# Altium PCB mezza.PcbDoc
Units mm, origin at the board's own origin, x right, y up, seen from the top; angles counter-clockwise.
Board outline 85 x 54 mm, 2 copper layers (Top Layer, Bottom Layer), stack 1.071 mm thick; 2 components, 77 nets, 106 pads, 0 vias.
Unrouted connection lines stored in the file: 27.
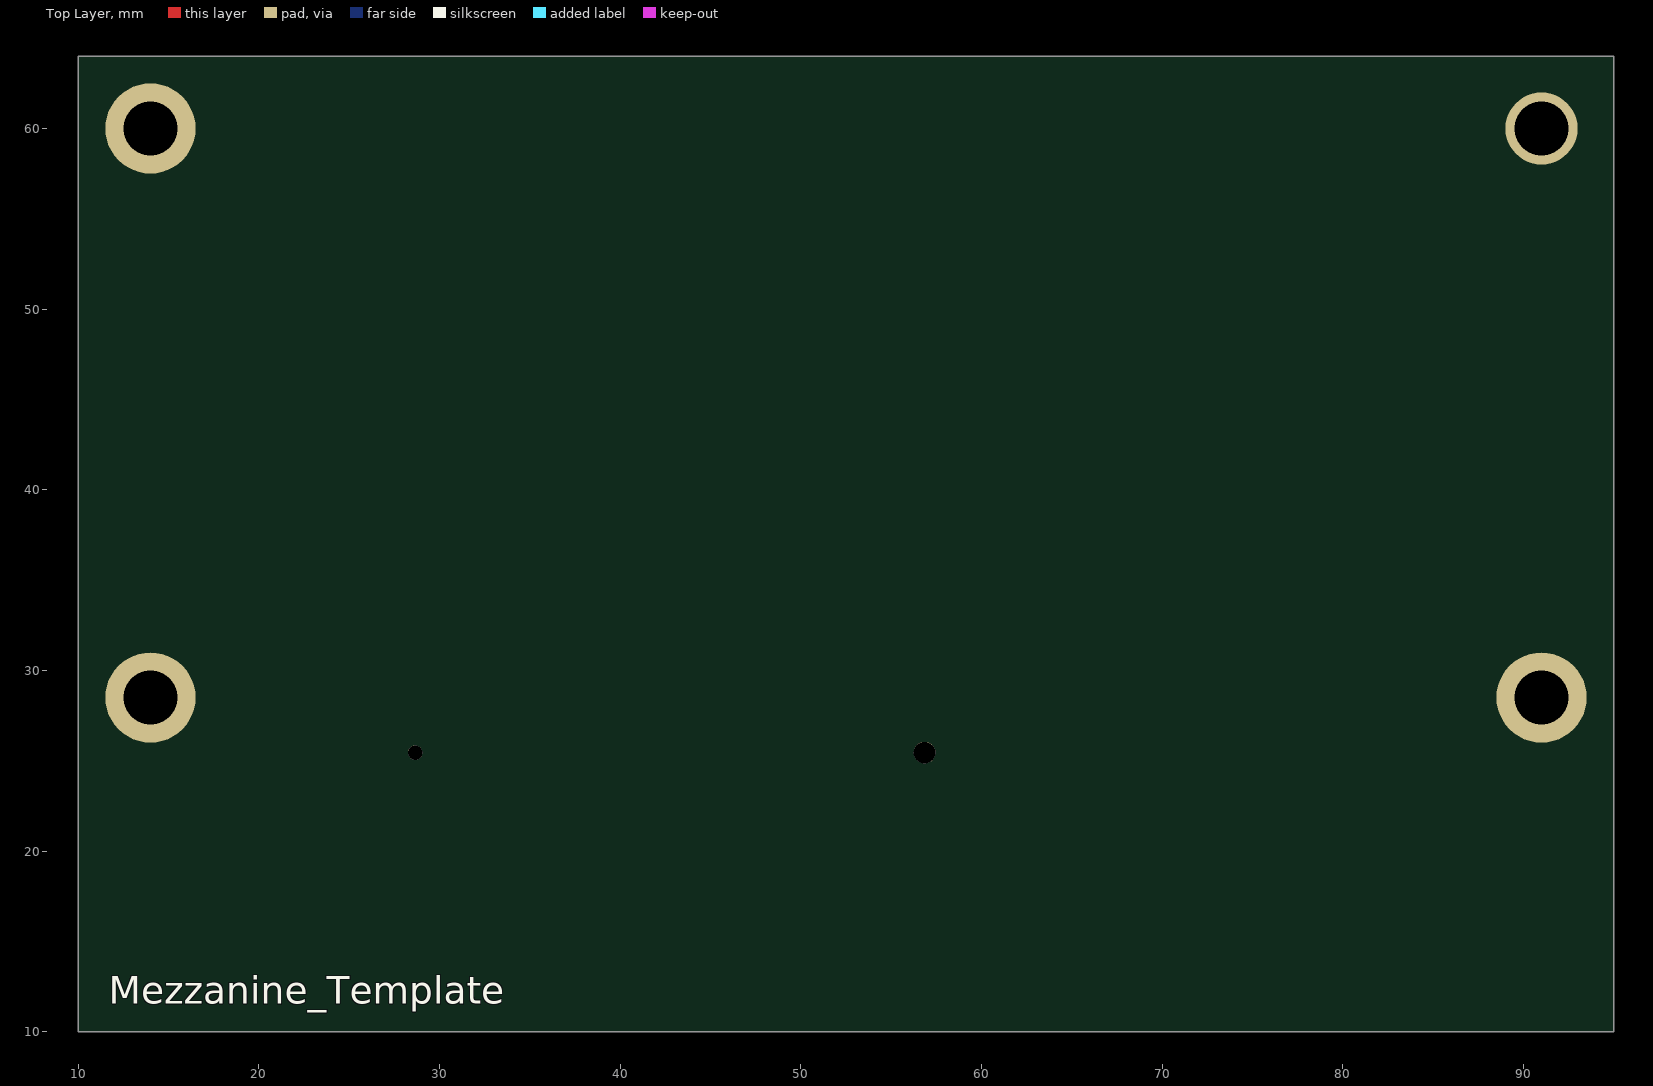
[diagram p0: Top Layer view]
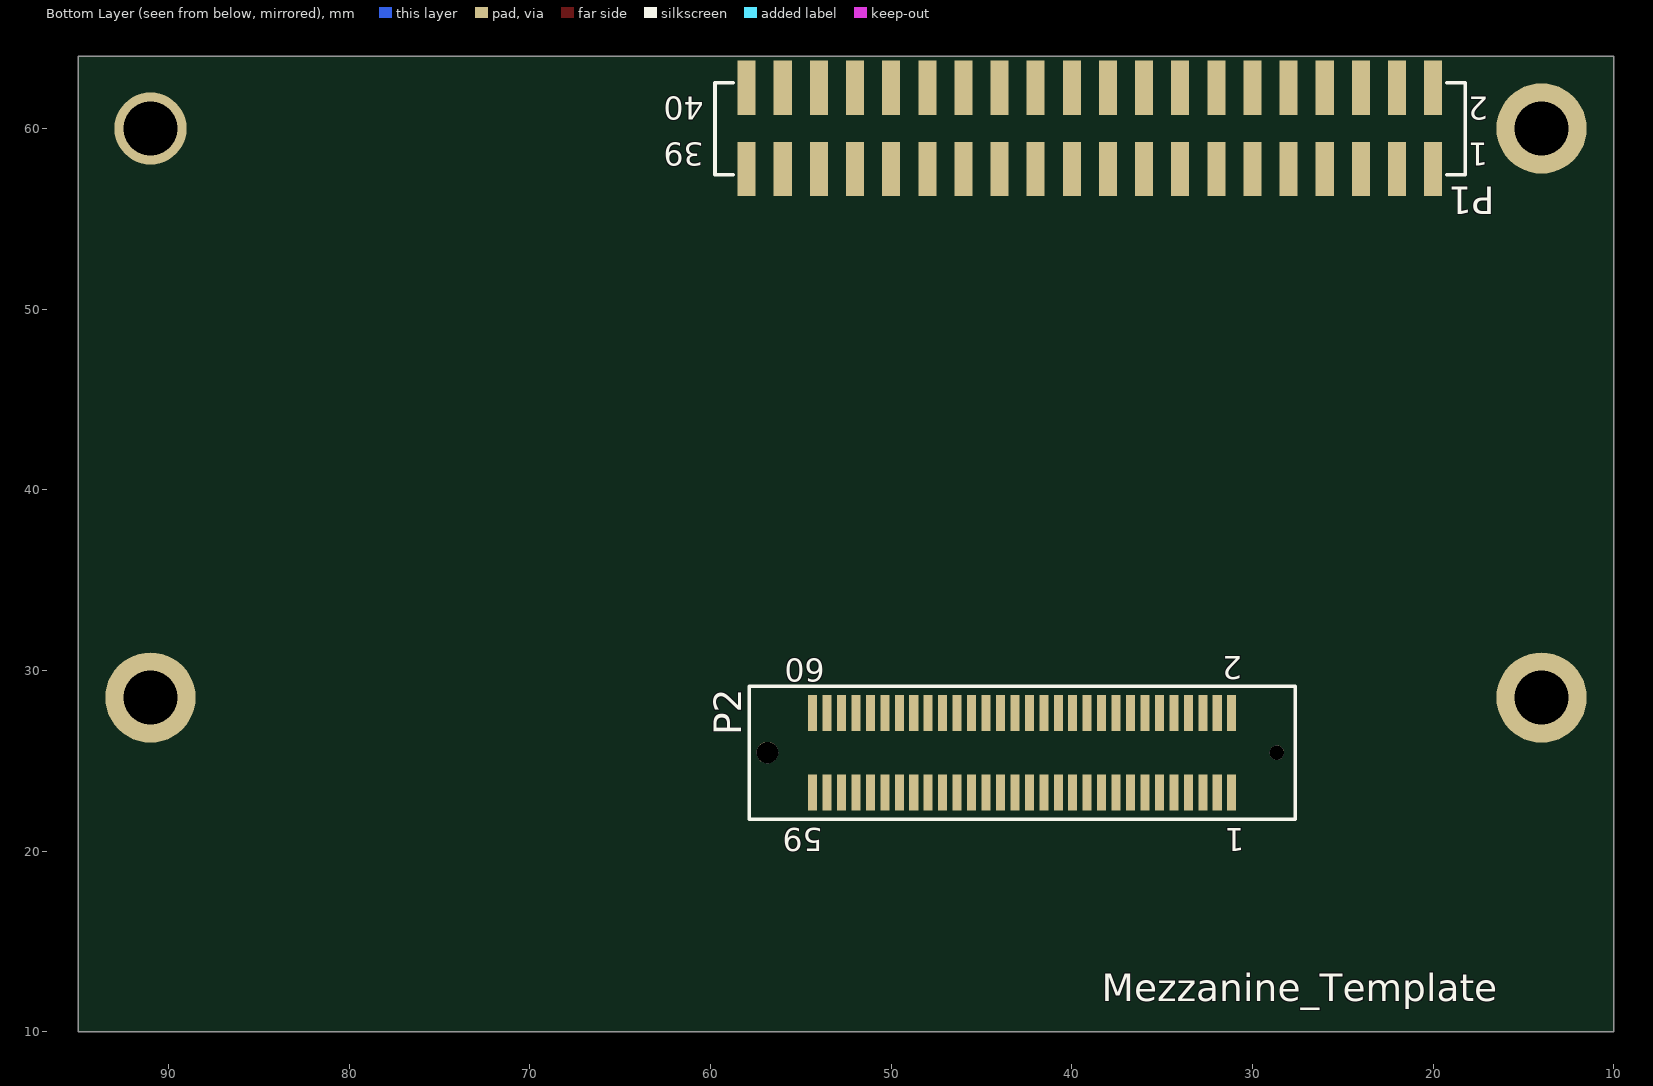
[diagram p1: Bottom Layer view, seen from below]

## Layer stack, top to bottom
Top Solder: solder mask 0.0102, Solder Resist, Dk 3.5
Top Layer: signal copper 0.0356
Dielectric 1: dielectric 1, FR-4, Dk 4.8
Bottom Layer: signal copper 0.0356
Bottom Solder: solder mask 0.0102, Solder Resist, Dk 3.5

## Board outline
10,10 95,10 95,64 10,64

## Design rules (kind name [scope] priority, off if disabled: settings)
Clearance [All] p1: gap=0.254
PolygonConnect [All] p1: connectstyle=Relief reliefconductorwidth=0.254 reliefentries=4 polygonreliefangle="90 Angle" airgapwidth=0.254
RoomDefinition "keepout _through_hole_HDMI" [InComponentClass('Bottom Side Components')] p1: confinementstyle=ConfineOut formatcopy=TRUE lockcomponents=FALSE outline 26,21 44,21 44,10 26,10
RoomDefinition "keepout _through_hole_USB" [InComponentClass('Bottom Side Components')] p2: confinementstyle=ConfineOut formatcopy=TRUE lockcomponents=FALSE outline 58,25.7 95,25.7 95,10 58,10
RoomDefinition "keepout _through_hole_PWR" [InComponentClass('Bottom Side Components')] p3: confinementstyle=ConfineOut formatcopy=TRUE lockcomponents=FALSE outline 77.5,64 88.7,64 88.7,50.2 77.5,50.2
RoutingVias [All] p1: holewidth=0.711 width=1.27 viastyle="Through Hole" minholewidth=0.711 minwidth=1.27 maxholewidth=0.711 maxwidth=1.27
SolderMaskExpansion [All] p1: expansion=0.102
Width [All] p1: maxlimit=0.254 minlimit=0.254 preferedwidth=0.254
30 further rules are at their usual default settings.

## Components (designator, comment, footprint, x,y, rotation, side; value= is the part's Value field where it differs from the comment)
P1 "low-speed_connector" low-speed_connector_SM 20,61 r0 bottom
P2 "High-speed_connector" high-speed_connector 42.75,25.45 r0 bottom

## Footprints (in the part's own frame and the unit in brackets; to place one, negate y for a bottom-side part, rotate by r counter-clockwise, add the part's x,y. Pads: shape width x height; smd on the part's side, far side on the other; paste and mask are expansions set on the pad)
high-speed_connector [mm] "high-speed connector"
  rect 0.5x2 smd: 1(-11.6,2.2) 2(-11.6,-2.2) 3(-10.8,2.2) 4(-10.8,-2.2) 5(-10,2.2) 6(-10,-2.2) 7(-9.2,2.2) 8(-9.2,-2.2) 9(-8.4,2.2) 10(-8.4,-2.2) 11(-7.6,2.2) 12(-7.6,-2.2) 13(-6.8,2.2) 14(-6.8,-2.2) 15(-6,2.2) 16(-6,-2.2) 17(-5.2,2.2) 18(-5.2,-2.2) 19(-4.4,2.2) 20(-4.4,-2.2) 21(-3.6,2.2) 22(-3.6,-2.2) 23(-2.8,2.2) 24(-2.8,-2.2) 25(-2,2.2) 26(-2,-2.2) 27(-1.2,2.2) 28(-1.2,-2.2) 29(-0.4,2.2) 30(-0.4,-2.2) 31(0.4,2.2) 32(0.4,-2.2) 33(1.2,2.2) 34(1.2,-2.2) 35(2,2.2) 36(2,-2.2) 37(2.8,2.2) 38(2.8,-2.2) 39(3.6,2.2) 40(3.6,-2.2) 41(4.4,2.2) 42(4.4,-2.2) 43(5.2,2.2) 44(5.2,-2.2) 45(6,2.2) 46(6,-2.2) 47(6.8,2.2) 48(6.8,-2.2) 49(7.6,2.2) 50(7.6,-2.2) 51(8.4,2.2) 52(8.4,-2.2) 53(9.2,2.2) 54(9.2,-2.2) 55(10,2.2) 56(10,-2.2) 57(10.8,2.2) 58(10.8,-2.2) 59(11.6,2.2) 60(11.6,-2.2)
  round 0.8 hole 0.8 unplated: ""(-14.1,0)
  round 1.2 hole 1.2 unplated: ""(14.1,0)
  silkscreen extent -15.11,-3.68 15.11,3.68, body extent -14.9,-3 14.9,3, height 7.65
low-speed_connector_SM [mm] "Surface mount low-speed connector / 2mm pitch"
  rect 1x3 smd: 1(0,3.25) 2(0,-1.25) 3(2,3.25) 4(2,-1.25) 5(4,3.25) 6(4,-1.25) 7(6,3.25) 8(6,-1.25) 9(8,3.25) 10(8,-1.25) 11(10,3.25) 12(10,-1.25) 13(12,3.25) 14(12,-1.25) 15(14,3.25) 16(14,-1.25) 17(16,3.25) 18(16,-1.25) 19(18,3.25) 20(18,-1.25) 21(20,3.25) 22(20,-1.25) 23(22,3.25) 24(22,-1.25) 25(24,3.25) 26(24,-1.25) 27(26,3.25) 28(26,-1.25) 29(28,3.25) 30(28,-1.25) 31(30,3.25) 32(30,-1.25) 33(32,3.25) 34(32,-1.25) 35(34,3.25) 36(34,-1.25) 37(36,3.25) 38(36,-1.25) 39(38,3.25) 40(38,-1.25)
  silkscreen extent -1.78,-1.52 39.75,3.56, body extent -1.65,-2.29 39.62,4.3, height 6

## Free pads (board coordinates)
  round 5 hole 3: ""(14,28.5) ""(14,60) ""(91,28.5)
  round 4 hole 3: ""(91,60)

## Nets (pads, with @x,y where several pads share a name; then routed paths per layer and width w, separated by ;. In a path a pad name is that pad's centre, name@x,y a point inside that pad or via, vN(x,y) a via of type N, cw(c..) or ccw(c..) an arc to the next point about the centre after c; other vN are vias at no path point)
+1V8: P1.35
+5V: P1.37
CCSI0_D1-: P2.16
CLK0/CSI0_MCLK: P2.15
CLK1/CSI1_MCLK: P2.17
CSI0_C+: P2.2
CSI0_C-: P2.4
CSI0_D0+: P2.8
CSI0_D0-: P2.10
CSI0_D1+: P2.14
CSI0_D2+: P2.20
CSI0_D2-: P2.22
CSI0_D3+: P2.26
CSI0_D3-: P2.28
CSI1_C+: P2.54
CSI1_C-: P2.56
CSI1_D0+: P2.42
CSI1_D0-: P2.44
CSI1_D1+: P2.48
CSI1_D1-: P2.50
DSI_CLK+: P2.21
DSI_CLK-: P2.23
DSI_D0+: P2.27
DSI_D0-: P2.29
DSI_D1+: P2.33
DSI_D1-: P2.35
DSI_D2+: P2.39
DSI_D2-: P2.41
DSI_D3+: P2.45
DSI_D3-: P2.47
GND: P1.1 P1.2 P1.39 P1.40 P2.6 P2.12 P2.13 P2.18 P2.19 P2.24 P2.25 P2.30 P2.31 P2.37 P2.40 P2.43 P2.46 P2.49 P2.52 P2.55 P2.58 pad.
GPIO-A: P1.23
GPIO-B: P1.24
GPIO-C: P1.25
GPIO-D: P1.26
GPIO-E: P1.27
GPIO-F: P1.28
GPIO-G: P1.29
GPIO-H: P1.30
GPIO-I: P1.31
GPIO-J: P1.32
GPIO-K: P1.33
GPIO-L: P1.34
HSIC_DATA: P2.59
HSIC_STR: P2.57
I2C0_SCL: P1.15
I2C0_SDA: P1.17
I2C1_SCL: P1.19
I2C1_SDA: P1.21
I2C2_SCL: P2.32 P2.34
I2C3_SDA: P2.36
PCM_CLK: P1.18
PCM_D0: P1.20
PCM_DI: P1.22
PCM_FS: P1.16
PWR_BTN_N: P1.4
RESERVED: P2.38 P2.60
RST_BTN_N: P1.6
SD_CMD/SPI1_DIN: P2.11
SD_DAT0/SPI1_DOUT: P2.1
SD_DAT1: P2.3
SD_DAT2: P2.5
SD_DAT3/SPI1_CS: P2.7
SD_SCLK/SPI1_SCLK: P2.9
SPI0_CS: P1.12
SPI0_DIN: P1.10
SPI0_DOUT: P1.14
SPI0_SCL: P1.8
SYS_DCIN: P1.36 P1.38
UART0_CTS: P1.3
UART0_RTS: P1.9
UART0_RXD: P1.7
UART0_TXD: P1.5
UART1_RXD: P1.13
UART1_TXD: P1.11
USB_D+: P2.51
USB_D-: P2.53
pads on no net: P2.

## Silkscreen, mask and mechanical layers (free items; w line width, h text height)
Top Overlay:
  text "Mezzanine_Template" at 11.684,11.557 h1.52
Bottom Overlay:
  text "Mezzanine_Template" at 38.354,11.684 h1.52
Mechanical 1:
  the board outline again, w0.5

## Text inside footprints (layer, text, board x,y; h text height)
P1: Bottom Overlay "2" at 16.952,61.762 h1.27 r180; Bottom Overlay "40" at 60.386,61.762 h1.27 r180; Bottom Overlay "39" at 60.386,59.222 h1.27 r180; Bottom Overlay "1" at 16.952,59.222 h1.27 r180
P2: Bottom Overlay "1" at 30.431,21.259 h1.27 r180; Bottom Overlay "59" at 53.799,21.259 h1.27 r180; Bottom Overlay "60" at 53.672,30.657 h1.27 r180; Bottom Overlay "2" at 30.558,30.784 h1.27 r180